# Altium PCB SmallyMouse2.PcbDoc
Units mm, origin at the board's own origin, x right, y up, seen from the top; angles counter-clockwise.
Board outline 38.61 x 37.08 mm, 4 copper layers (F.Cu, GND, 5V, B.Cu), stack 0.603 mm thick; 17 components, 19 nets, 103 pads, 27 vias.
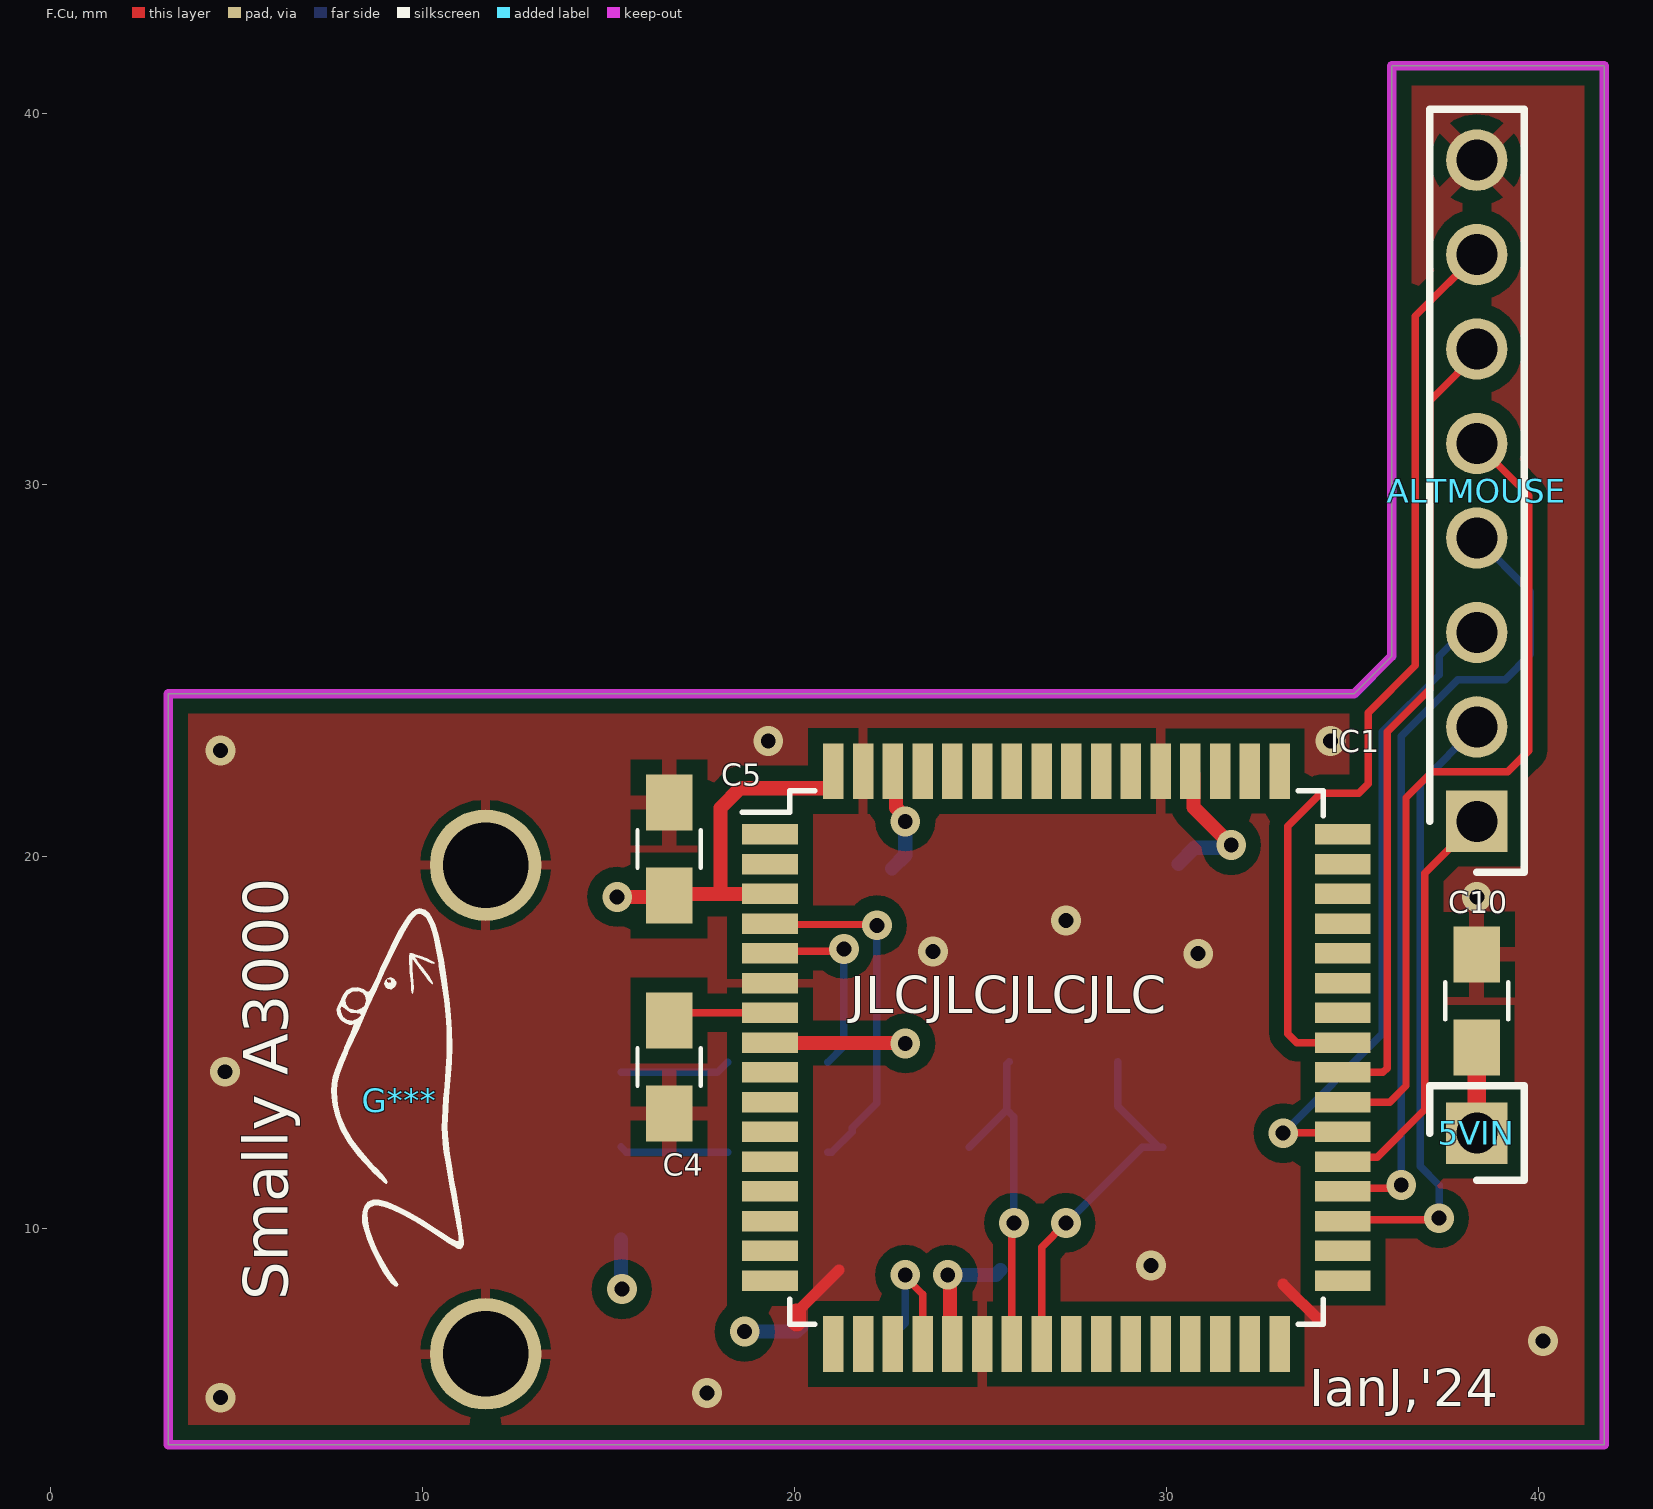
[diagram p0: F.Cu view]
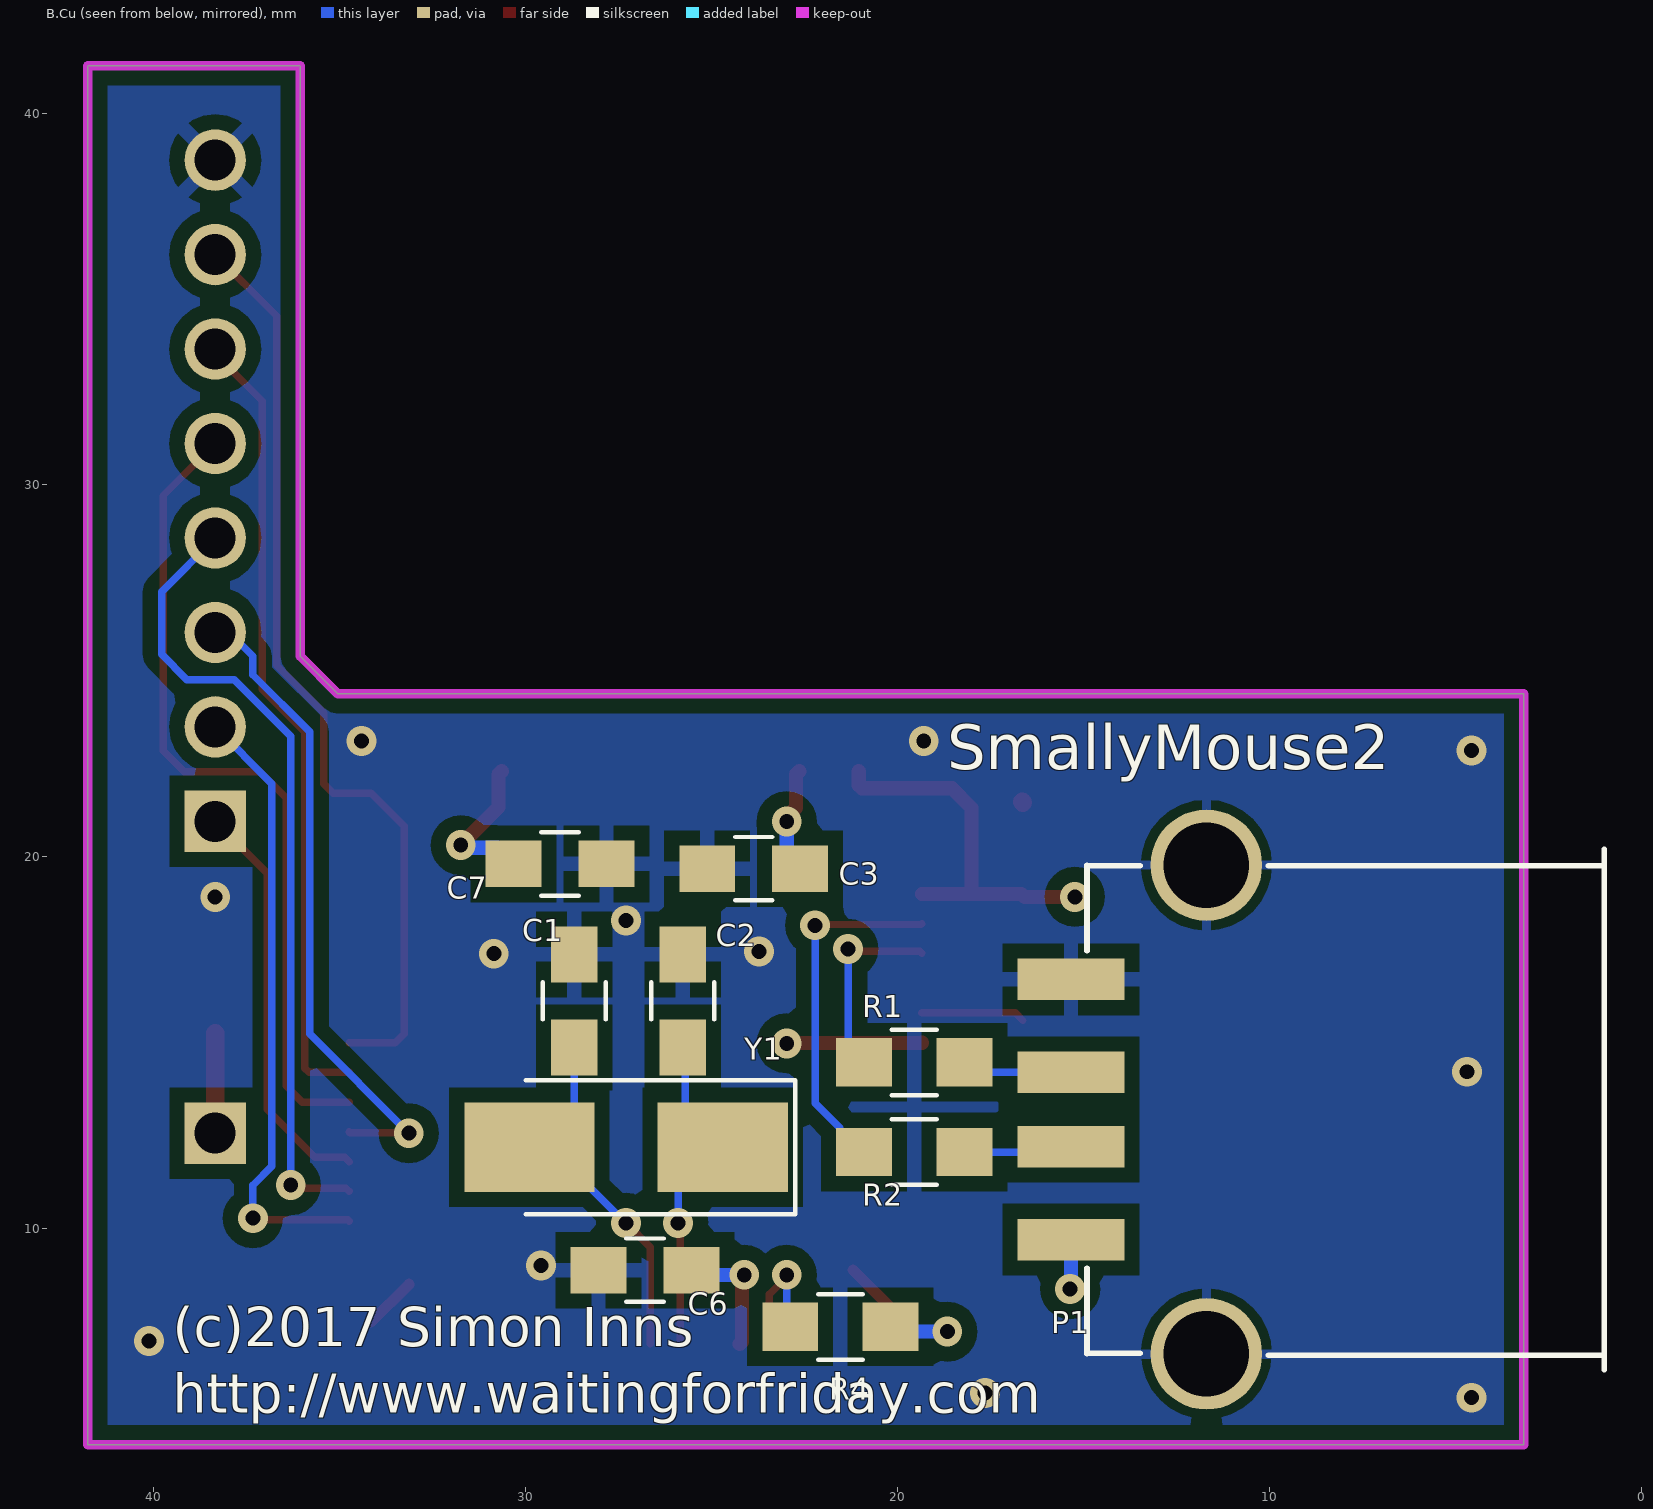
[diagram p1: B.Cu view, seen from below]
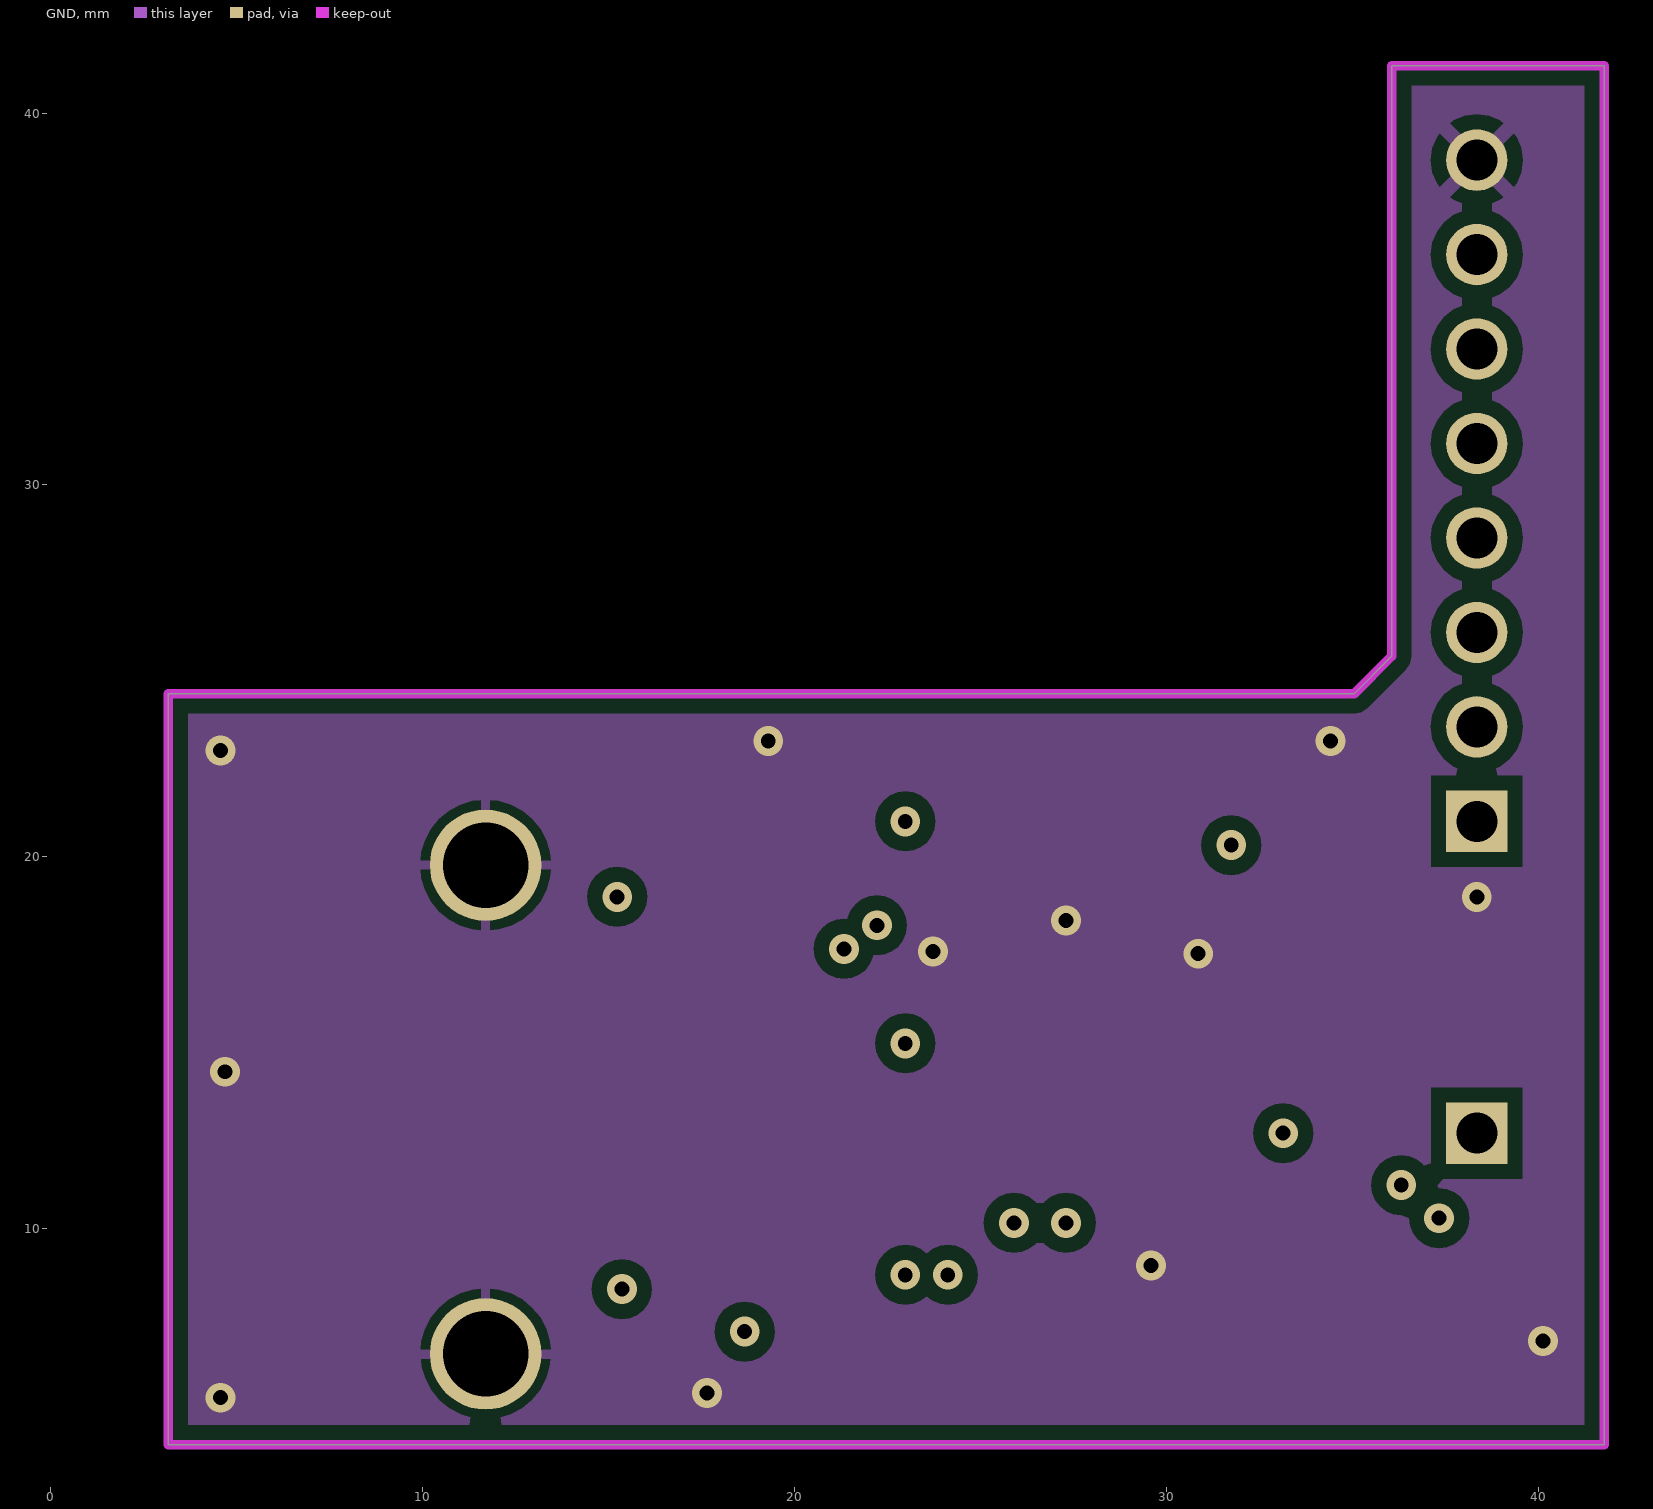
[diagram p2: GND]
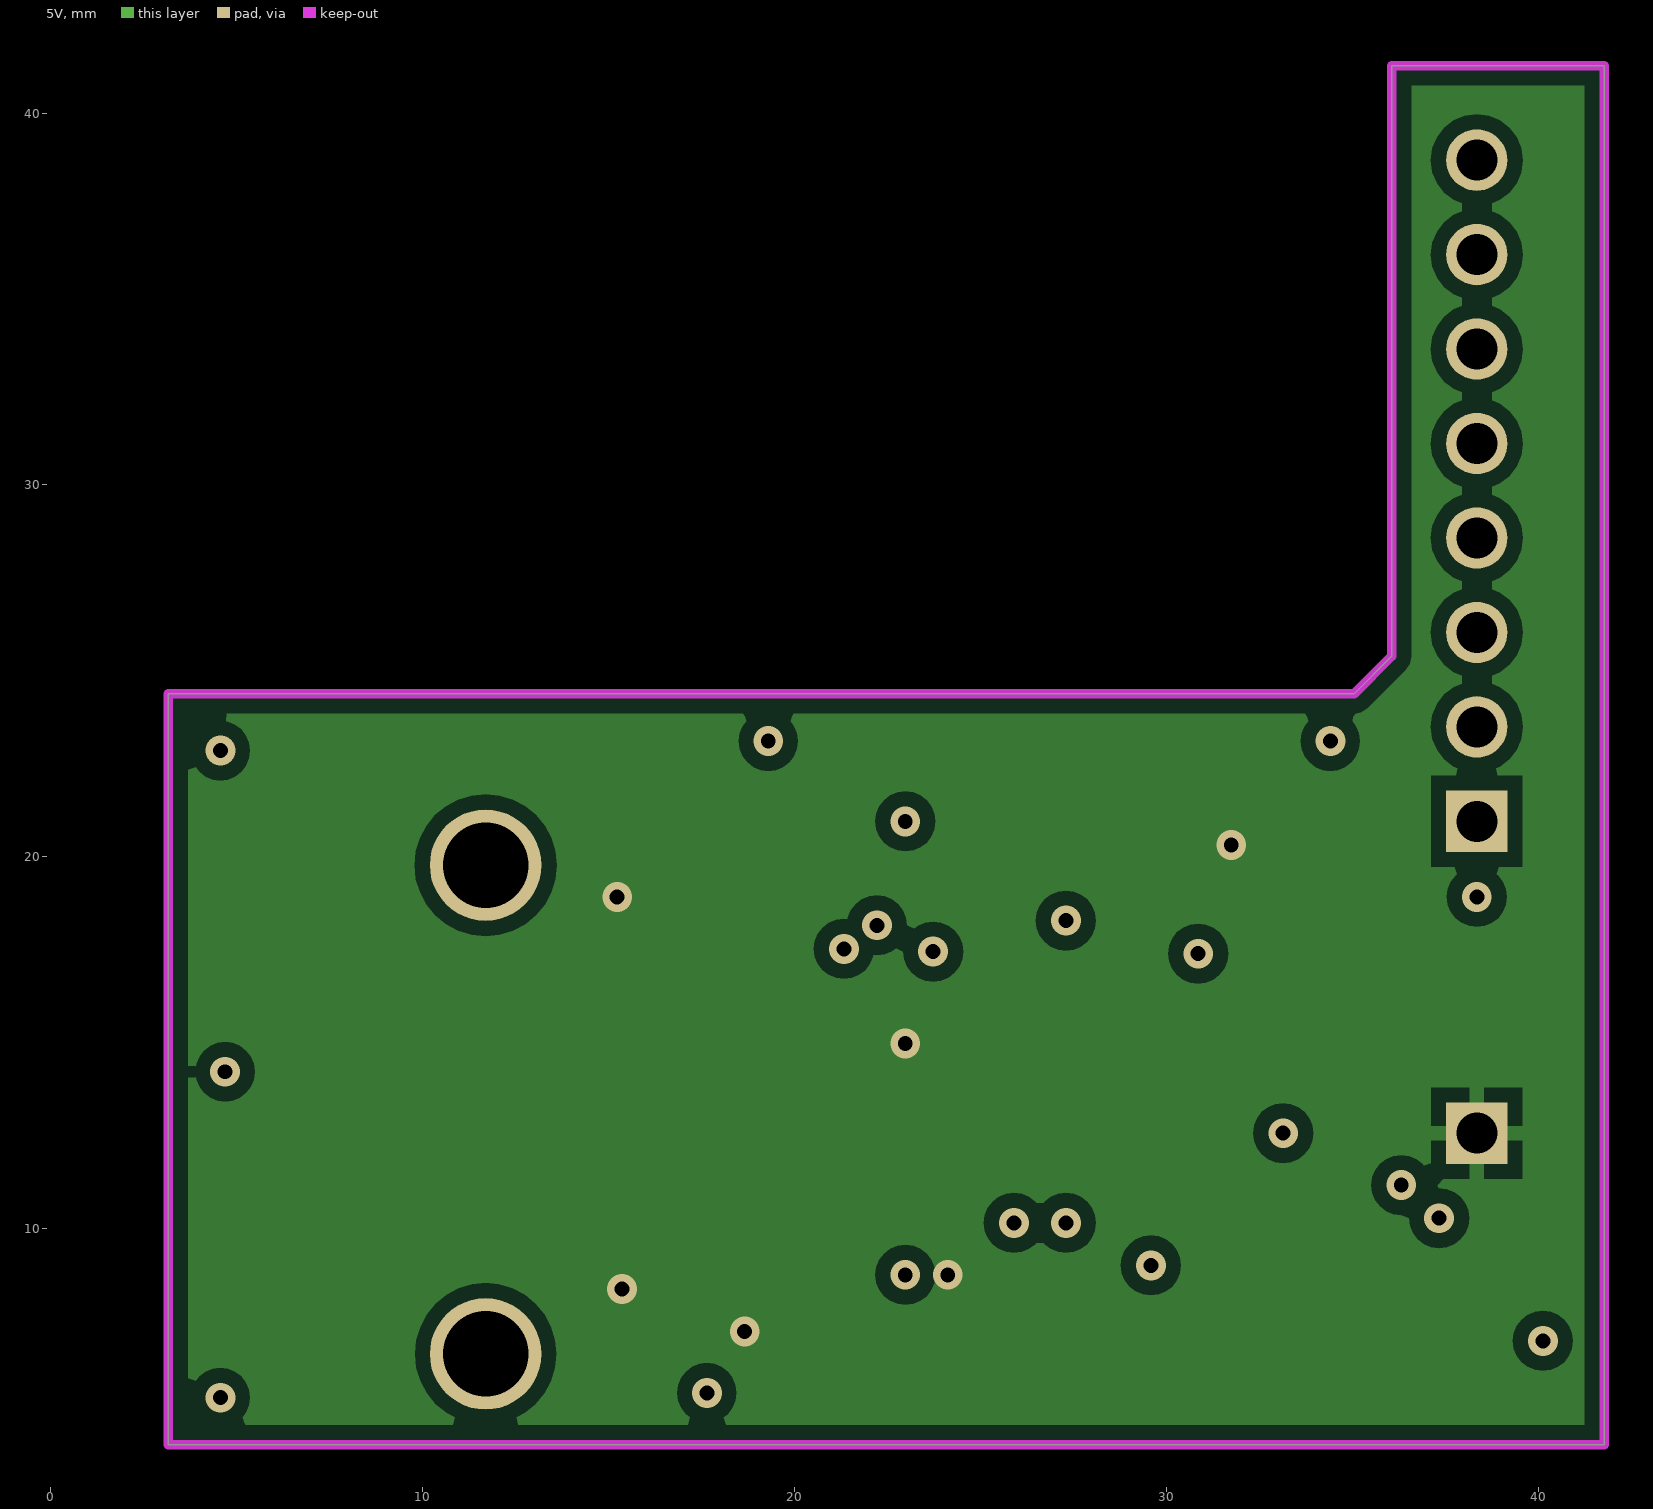
[diagram p3: 5V]

## Layer stack, top to bottom
F.Mask: solder mask 0.0102, Solder Resist, Dk 3.5
F.Cu: signal copper 0.0356
Dielectric 2: prepreg 0.0711, PP-006, Dk 4.1
GND: signal copper 0.035
Dielectric 1: dielectric 0.32, FR-4, Dk 4.8
5V: signal copper 0.035
Dielectric 3: prepreg 0.0711, PP-006, Dk 4.1
B.Cu: signal copper 0.0356
B.Mask: solder mask 0.0102, Solder Resist, Dk 3.5

## Board outline
36.068,25.4 35.052,24.384 3.175,24.384 3.175,4.191 41.783,4.191 41.783,41.275 36.068,41.275

## Design rules (kind name [scope] priority, off if disabled: settings)
Clearance "Clearence 0.4_Polygon" [InNamedPolygon('B.Cu-GND') OR InNamedPolygon('F.Cu-GND')] p1: gap=0.4 ignorepadtopadclearanceinfootprint=FALSE
Clearance "Clearence 0.2_NetClass" [InNetClass('Default')] p2: gap=0.2 ignorepadtopadclearanceinfootprint=FALSE
HoleSize "Hole Size (Default)" [All] p1: absolutevalues=TRUE maxlimit=10 minlimit=0.3 maxpercent=80.000 minpercent=20.000
MinimumSolderMaskSliver [All] p1: minsoldermaskwidth=0
PolygonConnect Polygon_F.Cu-GND_ConnectDirect [IsNamedPolygon('F.Cu-GND') vs IsVia] p1: connectstyle=Direct reliefconductorwidth=0.254 reliefentries=4 polygonreliefangle="90 Angle" airgapwidth=0.254
PolygonConnect Polygon_F.Cu-GND_ConnectRelief45 [IsNamedPolygon('F.Cu-GND') vs (IsThruPin or IsSMTPin) and (PadShape_AllLayers = 'Round')] p2: connectstyle=Relief reliefconductorwidth=0.4 reliefentries=4 polygonreliefangle="45 Angle" airgapwidth=0.4
PolygonConnect Polygon_F.Cu-GND_ConnectRelief90 [IsNamedPolygon('F.Cu-GND') vs (IsThruPin or IsSMTPin) and (PadShape_AllLayers <> 'Round')] p3: connectstyle=Relief reliefconductorwidth=0.4 reliefentries=4 polygonreliefangle="90 Angle" airgapwidth=0.4
PolygonConnect Polygon_B.Cu-GND_ConnectDirect [IsNamedPolygon('B.Cu-GND') vs IsVia] p4: connectstyle=Direct reliefconductorwidth=0.254 reliefentries=4 polygonreliefangle="90 Angle" airgapwidth=0.254
PolygonConnect Polygon_B.Cu-GND_ConnectRelief45 [IsNamedPolygon('B.Cu-GND') vs (IsThruPin or IsSMTPin) and (PadShape_AllLayers = 'Round')] p5: connectstyle=Relief reliefconductorwidth=0.4 reliefentries=4 polygonreliefangle="45 Angle" airgapwidth=0.4
PolygonConnect Polygon_B.Cu-GND_ConnectRelief90 [IsNamedPolygon('B.Cu-GND') vs (IsThruPin or IsSMTPin) and (PadShape_AllLayers <> 'Round')] p6: connectstyle=Relief reliefconductorwidth=0.4 reliefentries=4 polygonreliefangle="90 Angle" airgapwidth=0.4
RoutingVias [All] p1: holewidth=0.711 width=1.27 viastyle="Through Hole" minholewidth=0.711 minwidth=1.27 maxholewidth=0.711 maxwidth=1.27
SilkToSilkClearance [All] p1: silktosilkclearance=0
SilkToSolderMaskClearance [IsPad] p1: minsilkscreentomaskgap=0 clearancetoexposedcopper=TRUE
SolderMaskExpansion [All] p1: expansion=0.102 istentingtop=FALSE
Width [All] p1: maxlimit=10 minlimit=0.2 preferedwidth=0.254 toplayer_prefwidth=0.25 midlayer1_minwidth=0.254 midlayer1_maxwidth=0.254 midlayer2_minwidth=0.254 midlayer2_maxwidth=0.254 bottomlayer_prefwidth=0.25 minimp=50.000000 maximp=50.000000 favimp=50.000000
26 further rules are at their usual default settings.

## Classes and differential pairs
component class SmallyMouse2: 5VIN C1 C2 C3 C4 C5 C6 C7 C10 IC1 P1 R1 R2 R3 R4 Y1

## Components (designator, comment, footprint, x,y, rotation, side; value= is the part's Value field where it differs from the comment)
5VIN "90120-0761" HDRV1W90P0X254_1X1_232X249X560P 38.354,12.573 r90 top
ALTMOUSE "90120-0768" HDRV8W90P0X254_1X8_2032X249X560P 38.354,20.955 r90 top locked
C1 "22pF" C_0805_HandSoldering 28.702,16.129 r90 bottom
C2 "22pF" C_0805_HandSoldering 25.781,16.129 r90 bottom
C3 "100nF" C_0805_HandSoldering 23.876,19.685 r0 bottom
C4 "1uF" C_0805_HandSoldering 16.637,14.351 r270 top
C5 "100nF" C_0805_HandSoldering 16.637,20.213 r270 top
C6 "100nF" C_0805_HandSoldering 26.797,8.89 r180 bottom
C7 "100nF" C_0805_HandSoldering 29.083,19.812 r0 bottom
C10 "100nF" C_0805_HandSoldering 38.354,16.129 r270 top
G*** "LOGO" sm2logo 9.398,13.462 r100 top
IC1 "AT90USB1287" TQFP-64_14x14mm_Pitch0.8mm 27.051,14.605 r0 top locked
P1 "USB_A" Amphenol_87583-2010BLF 13.843,13.208 r90 bottom
R1 "22R" R_0805_HandSoldering 19.558,14.478 r180 bottom
R2 "22R" R_0805_HandSoldering 19.558,12.065 r180 bottom
R4 "10K" R_0805_HandSoldering 21.543,7.366 r180 bottom
Y1 "16 MHz Crystal" Crystal_SMD_5032-2pin_5.0x3.2mm_HandSoldering 27.305,12.192 r0 bottom

## Footprints (in the part's own frame and the unit in brackets; to place one, negate y for a bottom-side part, rotate by r counter-clockwise, add the part's x,y. Pads: shape width x height; smd on the part's side, far side on the other; paste and mask are expansions set on the pad)
Amphenol_87583-2010BLF [mm]
  rect 1.12x2.88 smd mask+0: 1(-3.5,1.5) 2(-1,1.5) 3(1,1.5) 4(3.5,1.5)
  round 3 hole 2.3 paste-2539.97 mask+0: 5(-6.57,-2.14) 5(6.57,-2.14)
  silkscreen extent -7,-12.84 7,1.07
C_0805_HandSoldering [mm]
  rect 1.5x1.25 smd mask+0: 1(-1.25,0) 2(1.25,0)
  silkscreen extent -0.5,-0.85 0.5,0.85
Crystal_SMD_5032-2pin_5.0x3.2mm_HandSoldering [mm]
  rect 3.5x2.4 smd mask+0: 1(-2.6,0) 2(2.6,0)
  silkscreen extent -4.55,-1.8 2.7,1.8
HDRV1W90P0X254_1X1_232X249X560P [mm]
  rect 1.65x1.65 hole 1.1: 1(0,0)
  silkscreen extent -1.27,-1.27 1.27,1.27, body extent -1.27,-1.25 1.27,1.25, height 5.37
HDRV8W90P0X254_1X8_2032X249X560P [mm]
  rect 1.65x1.65 hole 1.1: 1(0,0)
  round 1.65 hole 1.1: 2(2.54,0) 3(5.08,0) 4(7.62,0) 5(10.16,0) 6(12.7,0) 7(15.24,0) 8(17.78,0)
  silkscreen extent -1.37,-1.27 19.15,1.27, body extent -1.27,-1.25 19.05,1.25, height 5.27
R_0805_HandSoldering [mm]
  rect 1.5x1.3 smd mask+0: 1(-1.35,0) 2(1.35,0)
  silkscreen extent -0.6,-0.88 0.6,0.88
sm2logo [mm]
  silkscreen extent -4.93,-1.81 4.99,1.79
TQFP-64_14x14mm_Pitch0.8mm [mm]
  rect 1.5x0.55 smd mask+0: 1(-7.7,6) 2(-7.7,5.2) 3(-7.7,4.4) 4(-7.7,3.6) 5(-7.7,2.8) 6(-7.7,2) 7(-7.7,1.2) 8(-7.7,0.4) 9(-7.7,-0.4) 10(-7.7,-1.2) 11(-7.7,-2) 12(-7.7,-2.8) 13(-7.7,-3.6) 14(-7.7,-4.4) 15(-7.7,-5.2) 16(-7.7,-6) 33(7.7,-6) 34(7.7,-5.2) 35(7.7,-4.4) 36(7.7,-3.6) 37(7.7,-2.8) 38(7.7,-2) 39(7.7,-1.2) 40(7.7,-0.4) 41(7.7,0.4) 42(7.7,1.2) 43(7.7,2) 44(7.7,2.8) 45(7.7,3.6) 46(7.7,4.4) 47(7.7,5.2) 48(7.7,6)
  rect 0.55x1.5 smd mask+0: 17(-6,-7.7) 18(-5.2,-7.7) 19(-4.4,-7.7) 20(-3.6,-7.7) 21(-2.8,-7.7) 22(-2,-7.7) 23(-1.2,-7.7) 24(-0.4,-7.7) 25(0.4,-7.7) 26(1.2,-7.7) 27(2,-7.7) 28(2.8,-7.7) 29(3.6,-7.7) 30(4.4,-7.7) 31(5.2,-7.7) 32(6,-7.7) 49(6,7.7) 50(5.2,7.7) 51(4.4,7.7) 52(3.6,7.7) 53(2.8,7.7) 54(2,7.7) 55(1.2,7.7) 56(0.4,7.7) 57(-0.4,7.7) 58(-1.2,7.7) 59(-2,7.7) 60(-2.8,7.7) 61(-3.6,7.7) 62(-4.4,7.7) 63(-5.2,7.7) 64(-6,7.7)
  silkscreen extent -8.45,-7.17 7.17,7.17

## Part data
5VIN: "Connector", Manufacturer_Name=Molex, Mouser Part Number=538-90120-0761, Datasheet Link=https://www.molex.com/pdm_docs/sd/901200761_sd.pdf, Height=5.6mm, Manufacturer_Part_Number=90120-0761, Mouser Price/Stock=https://www.mouser.co.uk/ProductDetail/Molex/90120-0761?qs=PvP5v7Eimsn%2F58TpDaAAow%3D%3D
ALTMOUSE: "Connector", Manufacturer_Name=Molex, Mouser Part Number=538-90120-0768, Arrow Part Number=90120-0768, Arrow Price/Stock=http://www.arrow.com/en/products/90120-0768/molex, Datasheet Link=http://www.molex.com/molex/products/datasheet.jsp?part=active/0901200768_PCB_HEADERS.xml, Height=5.6mm, Manufacturer_Part_Number=90120-0768, Mouser Price/Stock=https://www.mouser.co.uk/ProductDetail/Molex/90120-0768?qs=PvP5v7EimsmChj6ovxYE3w%3D%3D
C1 C2 C3 C4 C5 C6 C7 C10: library part C
G***: library part sm2logo
IC1: library part AT90USB1287-RESCUE-SmallyMouse2
P1: library part USB_A-RESCUE-SmallyMouse2
R1 R2 R4: library part R
Y1: library part Crystal

## Via types
v1: diameter 0.8, hole 0.4, F.Cu to B.Cu, tented both sides, 27 vias

## Nets (pads, with @x,y where several pads share a name; then routed paths per layer and width w, separated by ;. In a path a pad name is that pad's centre, name@x,y a point inside that pad or via, vN(x,y) a via of type N, cw(c..) or ccw(c..) an arc to the next point about the centre after c; other vN are vias at no path point)
+5V: 5VIN.1 C5.2 C6.2 C7.2 C10.2 IC1.3 IC1.8 IC1.21 IC1.52 IC1.64 P1.1 R4.2 | length 26.8
  F.Cu w0.381: v1(15.24,18.923) 16.597,18.923 C5.2 16.679,19.005 18.015,19.005 ; IC1.8 19.36,14.995 22.978,14.995 v1(22.987,14.986) ; IC1.3 18.015,19.005 ; IC1.64 21.051,21.929 20.966,21.844 18.542,21.844 18.015,21.317 18.015,19.005 ; v1(24.13,8.763) 24.19,8.703 24.19,6.965 IC1.21 ; IC1.52 30.735,22.22 30.735,21.335 v1(31.75,20.32)
  F.Cu w0.5: 5VIN.1 C10.2@38.354,15.26
  B.Cu w0.381: P1.1 15.343,8.406 v1(15.367,8.382) ; v1(18.669,7.239) 20.066,7.239 R4.2 ; v1(24.13,8.763) 25.42,8.763 C6.2 ; C7.2 30.768,20.247 31.677,20.247 v1(31.75,20.32)
GND: ALTMOUSE.8 C1.2 C2.2 C3.2 C4.2 C5.1 C6.1 C7.1 C10.1 IC1.6 IC1.22 IC1.53 IC1.63 P1.4 P1.5 | length 3.3
  F.Cu w0.3: 20.066,7.747 21.209,8.89 ; 33.147,8.509 34.163,7.493
  F.Cu w0.5: C5.1 C5.1@16.657,21.483 ; 20.066,7.493 20.066,7.747
  other v1: 4.572,5.461 17.653,5.588 40.132,6.985 29.591,9.017 4.699,14.224 30.861,17.399 23.734,17.454 27.305,18.288 38.354,18.923 4.572,22.86 19.304,23.114 34.417,23.114
NetALTMOUSE_1: ALTMOUSE.1 IC1.37 | length 11.3
  F.Cu w0.2: IC1.37 34.874,11.928 35.677,11.928 36.957,13.208 36.957,19.558 ALTMOUSE.1@38.518,21.119
NetALTMOUSE_2: ALTMOUSE.2 IC1.35 | length 16.7
  F.Cu w0.2: IC1.35 34.792,10.246 37.297,10.246 v1(37.338,10.287)
  B.Cu w0.2: v1(37.338,10.287) 37.338,11.176 36.83,11.684 36.83,21.971 ALTMOUSE.2
NetALTMOUSE_3: ALTMOUSE.3 IC1.38 | length 17.5
  F.Cu w0.2: v1(33.147,12.573) 33.163,12.589 34.735,12.589 IC1.38
  B.Cu w0.2: v1(33.147,12.573) 35.814,15.24 35.814,23.368 37.338,24.892 37.338,25.4 37.973,26.035 ALTMOUSE.3
NetALTMOUSE_4: ALTMOUSE.4 IC1.36 | length 21.8
  F.Cu w0.2: IC1.36 34.836,11.091 36.237,11.091 v1(36.322,11.176)
  B.Cu w0.2: v1(36.322,11.176) 36.322,23.241 37.846,24.765 39.116,24.765 39.795,25.444 39.795,27.134 ALTMOUSE.4
NetALTMOUSE_5: ALTMOUSE.5 IC1.39 | length 22.7
  F.Cu w0.2: IC1.39 36.011,13.405 36.449,13.843 36.449,21.59 37.15,22.291 39.182,22.291 39.624,22.733 39.634,22.733 39.751,22.85 39.751,25.4 39.751,29.718 ALTMOUSE.5@38.046,31.423
NetALTMOUSE_6: ALTMOUSE.6 IC1.40 | length 21.7
  F.Cu w0.2: IC1.40 35.824,14.205 35.941,14.322 35.941,23.368 37.084,24.511 37.084,32.258 ALTMOUSE.6@38.529,33.703
NetALTMOUSE_7: ALTMOUSE.7 IC1.41 | length 25.3
  F.Cu w0.2: IC1.41 33.509,15.005 33.274,15.24 33.274,20.828 34.163,21.717 35.179,21.717 35.433,21.971 35.433,23.876 36.703,25.146 36.703,34.544 ALTMOUSE.7@38.434,36.275
NetC1_1: C1.1 IC1.24 Y1.2 | length 9.7
  F.Cu w0.2: IC1.24 26.651,9.506 v1(27.305,10.16)
  B.Cu w0.2: v1(27.305,10.16) 27.323,10.16 29.355,12.192 Y1.2@29.802,12.192 ; C1.1@28.702,14.498 28.702,13.292 Y1.2@29.802,12.192 ; Y1.2 Y1.2@29.802,12.192
NetC2_1: C2.1 IC1.23 Y1.1 | length 9.2
  F.Cu w0.2: IC1.23 25.851,10.103 v1(25.908,10.16)
  B.Cu w0.2: Y1.1 Y1.1@25.715,13.202 ; C2.1@25.781,14.498 25.715,14.432 Y1.1@25.715,13.202 ; v1(25.908,10.16) 25.908,13.008 Y1.1@25.715,13.202
NetC3_1: C3.1 IC1.62 | length 2.9
  F.Cu w0.381: IC1.62 22.735,22.22 22.735,21.32 22.987,21.068 v1(22.987,20.955)
  B.Cu w0.381: C3.1 22.987,20.046 v1(22.987,20.955)
NetC4_1: C4.1 IC1.7 | length 2.8
  F.Cu w0.2: C4.1 16.841,15.805 IC1.7
NetIC1_4: IC1.4 R2.1 | length 9.6
  F.Cu w0.2: IC1.4 19.373,18.183 22.203,18.183 v1(22.225,18.161)
  B.Cu w0.2: R2.1 21.008,12.065 21.558,12.615 21.558,12.715 22.225,13.382 v1(22.225,18.161)
NetIC1_5: IC1.5 R1.1 | length 5.3
  F.Cu w0.2: IC1.5 19.411,17.465 21.275,17.465 v1(21.336,17.526)
  B.Cu w0.2: R1.1 21.336,14.906 v1(21.336,17.526)
NetIC1_20: IC1.20 R4.1 | length 3.5
  F.Cu w0.2: v1(22.987,8.763) 22.987,8.701 23.451,8.237 IC1.20
  B.Cu w0.2: R4.1 22.987,7.46 v1(22.987,8.763)
NetIC1_43: IC1.43
NetP1_2: P1.2 R2.2 | length 2.9
  B.Cu w0.2: P1.2 15.486,12.065 R2.2
NetP1_3: P1.3 R1.2 | length 3
  B.Cu w0.2: P1.3 17.938,14.208 R1.2
pads on no net: IC1.1 IC1.2 IC1.9 IC1.10 IC1.11 IC1.12 IC1.13 IC1.14 IC1.15 IC1.16 IC1.17 IC1.18 IC1.19 IC1.25 IC1.26 IC1.27 IC1.28 IC1.29 IC1.30 IC1.31 IC1.32 IC1.33 IC1.34 IC1.42 IC1.44 IC1.45 IC1.46 IC1.47 IC1.48 IC1.49 IC1.50 IC1.51 IC1.54 IC1.55 IC1.56 IC1.57 IC1.58 IC1.59 IC1.60 IC1.61

## Polygon pours and split planes (outlines as drawn)
GND on GND "F.Cu-GND" (solid, remove dead copper, pour order 4): 41.783,4.191 3.175,4.191 3.175,42.926 41.783,42.926
+5V on 5V "F.Cu-GND" (solid, remove dead copper, pour order 7): 41.783,4.191 3.175,4.191 3.175,42.926 41.783,42.926
GND on F.Cu "F.Cu-GND" (solid, remove dead copper, pour order 1): 41.783,4.191 3.175,4.191 3.175,42.926 41.783,42.926
GND on B.Cu "B.Cu-GND" (solid, remove dead copper, pour order 0): 41.783,4.191 3.175,4.191 3.175,42.926 41.783,42.926

## Keep-outs
Edge.Cuts:
  the board outline again, w0.254

## Silkscreen, mask and mechanical layers (free items; w line width, h text height)
F.SilkS:
  text "JLCJLCJLCJLC" at 21.514,15.799 h1
  text "Smally A3000" at 6.385,8.074 h1.2 r90
  text "IanJ,'24" at 33.855,5.232 h1
B.SilkS:
  text "SmallyMouse2" at 18.669,22.352 h1.2
  text "(c)2017 Simon Inns / http://www.waitingforfriday.com" at 39.497,4.699 h1.8